# EAGLE board GrapherBlanK7 (EAGLE 5.10)
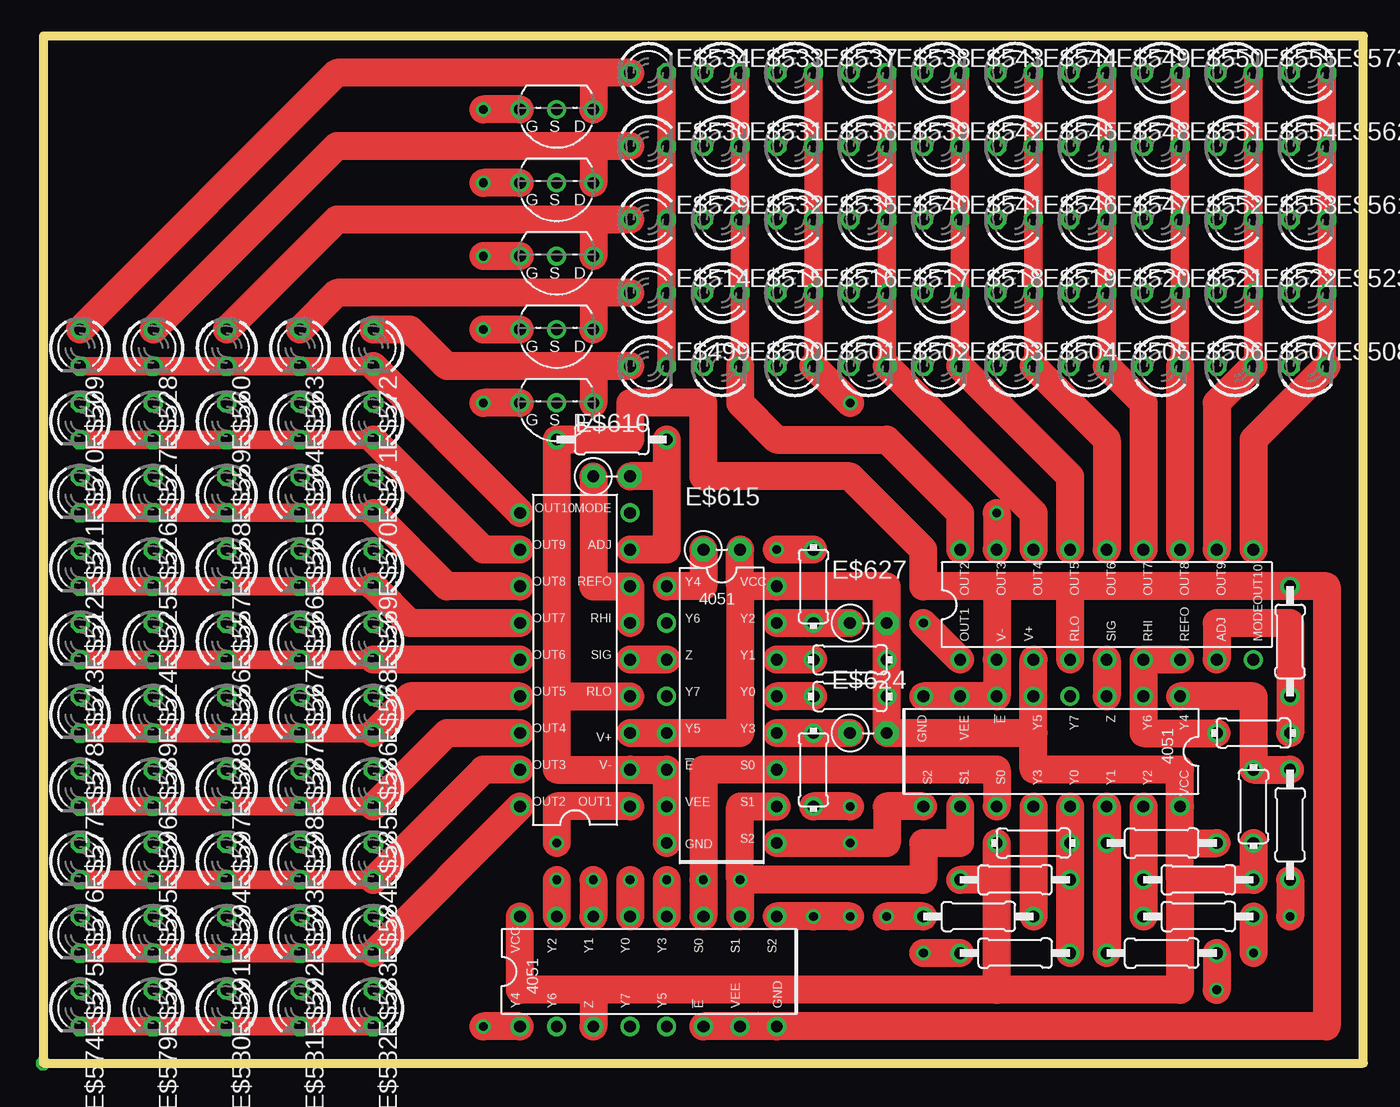
[diagram p0: board, top side]
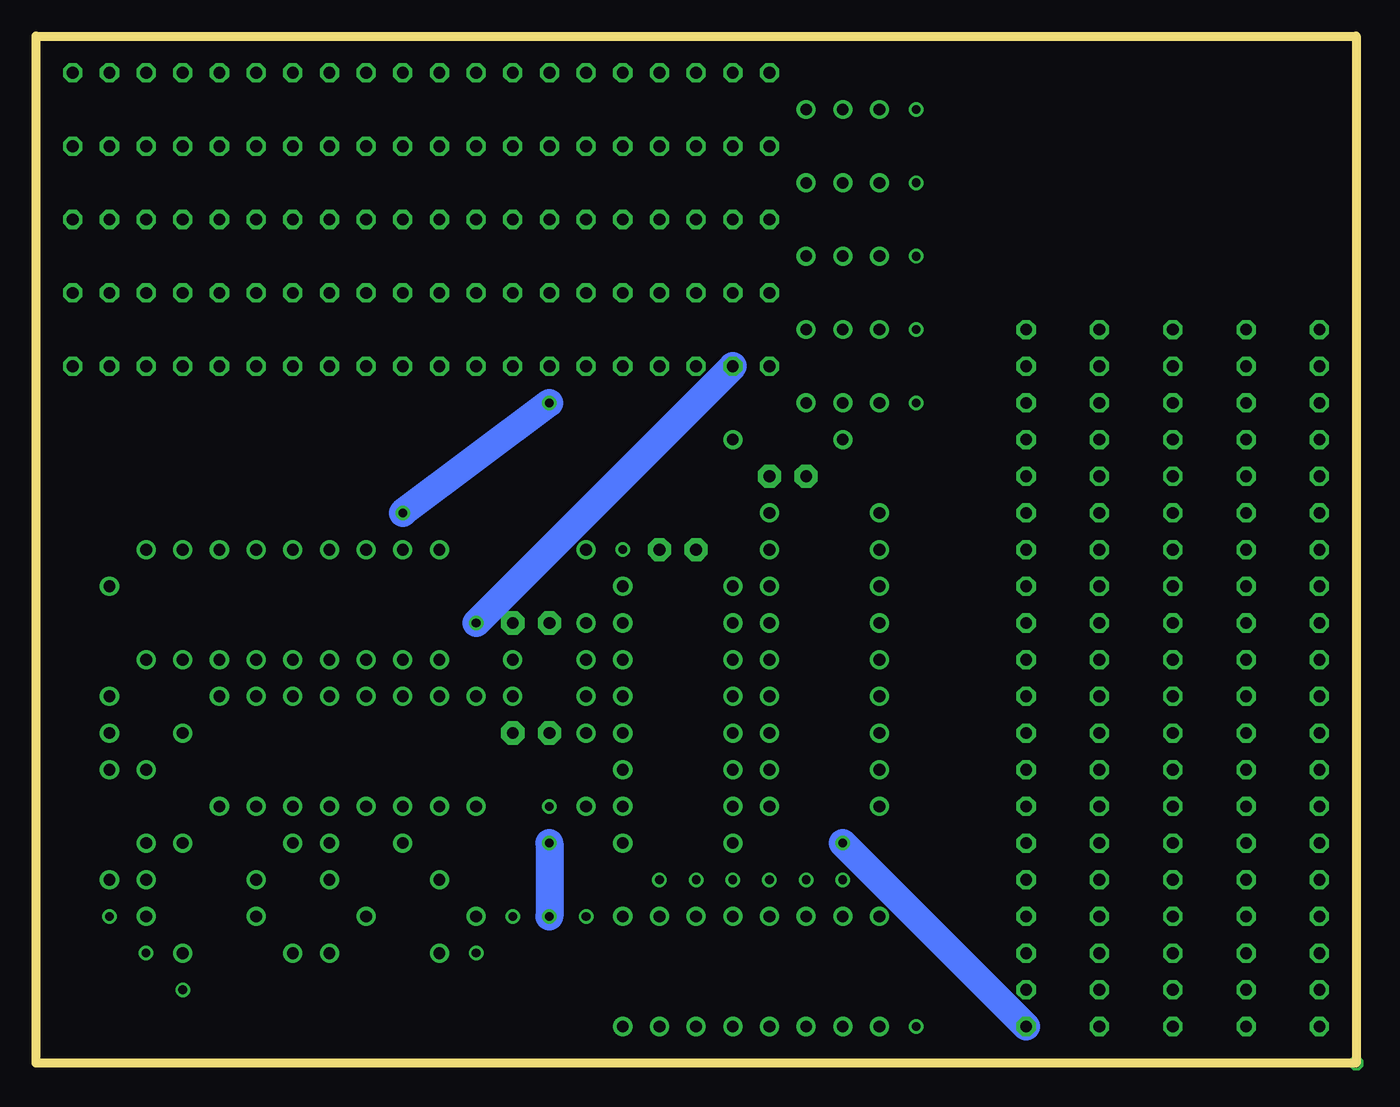
[diagram p1: board, bottom side, seen from below]

Size 91.44 x 71.12 mm. Coordinates in mm from the lower left corner, seen from the top.
Outline: 0,71.12 0,0 91.44,0 91.44,71.12 0,71.12
Copper layers (1*16): Top 0.035mm / dielectric 1.5mm / Bottom 0.035mm
Design rules "default": minimum track width 10mil, minimum drill 24mil, track to track 8mil, track to pad 8mil, pad to pad 8mil, via to via 8mil, smd to smd 8mil, copper to edge 40mil, drill to drill 8mil, minimum pad ring 10mil, minimum via ring 8mil, stop-mask expansion 4mil, vias tented up to drill 0mil, thermal gap 10mil
Milling: 1 lines

## Footprints (pad centres in the part's own frame; a part is rotated, then mirrored left to right if it is on the bottom)
RESISTOR-S2 = drill 0.813 round: IN1 -2.54,0; IN2 2.54,0
LED3MM = drill 0.813 octagon: A -1.27,0; K 1.27,0
LM3914-10LED-BARGRAPH = drill 0.813 round: 1!R -3.81,1.27; 1!S -3.81,3.81; 1Q 3.81,1.27; 2!R -3.81,-3.81; 2!S -3.81,-6.35; 2Q 3.81,-8.89; 2Q1 3.81,-11.43; 2Q3 -3.81,-11.43; 3!R 3.81,-1.27; 3!S 3.81,-3.81; 3Q 3.81,-6.35; 4!R 3.81,3.81; 4!S 3.81,6.35; 4Q -3.81,8.89; GND -3.81,-8.89; NC -3.81,6.35; OE -3.81,-1.27; VCC 3.81,8.89
4051-ANALOG-MUX = drill 0.813 round: CLOCK 3.81,-6.35; GND -3.81,-8.89; Q0 3.81,-8.89; Q1 -3.81,-6.35; Q2 -3.81,-3.81; Q3 -3.81,-1.27; Q4 -3.81,3.81; Q5 -3.81,6.35; Q6 -3.81,1.27; Q7 3.81,1.27; Q8 3.81,-1.27; Q9 3.81,3.81; Q10 3.81,6.35; Q11 -3.81,8.89; RESET 3.81,-3.81; VCC 3.81,8.89
RESISTOR = drill 0.813 round: IN1 -3.81,0; IN2 3.81,0
RS-2,5 = drill 0.813 pad 1.6 octagon: 1 -1.27,0; 2 1.27,0
TRANSISTOR = drill 0.8 round: P$1 0,0; P$2 2.54,0; P$3 -2.54,0

## Placement (x,y rotation side)
E$1  [RESISTOR-S2]  53.34,33.02 270 top
E$2  [RESISTOR-S2]  55.88,25.4 0 top
E$3  [RESISTOR-S2]  55.88,27.94 0 top
E$51  [LED3MM]  99.06,44.45 90 top  (outside the outline)
E$52  [LED3MM]  104.14,44.45 90 top  (outside the outline)
E$53  [LED3MM]  109.22,44.45 90 top  (outside the outline)
E$54  [LED3MM]  114.3,44.45 90 top  (outside the outline)
E$55  [LED3MM]  119.38,44.45 90 top  (outside the outline)
E$56  [LED3MM]  124.46,44.45 90 top  (outside the outline)
E$57  [LED3MM]  129.54,44.45 90 top  (outside the outline)
E$58  [LED3MM]  134.62,44.45 90 top  (outside the outline)
E$59  [LED3MM]  139.7,44.45 90 top  (outside the outline)
E$60  [LED3MM]  144.78,44.45 90 top  (outside the outline)
E$61  [LED3MM]  99.06,49.53 90 top  (outside the outline)
E$62  [LED3MM]  104.14,49.53 90 top  (outside the outline)
E$63  [LED3MM]  109.22,49.53 90 top  (outside the outline)
E$64  [LED3MM]  114.3,49.53 90 top  (outside the outline)
E$65  [LED3MM]  119.38,49.53 90 top  (outside the outline)
E$66  [LED3MM]  124.46,49.53 90 top  (outside the outline)
E$67  [LED3MM]  129.54,49.53 90 top  (outside the outline)
E$68  [LED3MM]  134.62,49.53 90 top  (outside the outline)
E$69  [LED3MM]  139.7,49.53 90 top  (outside the outline)
E$70  [LED3MM]  144.78,49.53 90 top  (outside the outline)
E$71  [LED3MM]  99.06,54.61 90 top  (outside the outline)
E$72  [LED3MM]  104.14,54.61 90 top  (outside the outline)
E$73  [LED3MM]  109.22,54.61 90 top  (outside the outline)
E$74  [LED3MM]  114.3,54.61 90 top  (outside the outline)
E$75  [LED3MM]  119.38,54.61 90 top  (outside the outline)
E$76  [LED3MM]  124.46,54.61 90 top  (outside the outline)
E$77  [LED3MM]  129.54,54.61 90 top  (outside the outline)
E$78  [LED3MM]  134.62,54.61 90 top  (outside the outline)
E$79  [LED3MM]  139.7,54.61 90 top  (outside the outline)
E$80  [LED3MM]  144.78,54.61 90 top  (outside the outline)
E$81  [LED3MM]  99.06,59.69 90 top  (outside the outline)
E$82  [LED3MM]  104.14,59.69 90 top  (outside the outline)
E$83  [LED3MM]  109.22,59.69 90 top  (outside the outline)
E$84  [LED3MM]  114.3,59.69 90 top  (outside the outline)
E$85  [LED3MM]  119.38,59.69 90 top  (outside the outline)
E$86  [LED3MM]  124.46,59.69 90 top  (outside the outline)
E$87  [LED3MM]  129.54,59.69 90 top  (outside the outline)
E$88  [LED3MM]  134.62,59.69 90 top  (outside the outline)
E$89  [LED3MM]  139.7,59.69 90 top  (outside the outline)
E$90  [LED3MM]  144.78,59.69 90 top  (outside the outline)
E$91  [LED3MM]  99.06,64.77 90 top  (outside the outline)
E$92  [LED3MM]  104.14,64.77 90 top  (outside the outline)
E$93  [LED3MM]  109.22,64.77 90 top  (outside the outline)
E$94  [LED3MM]  114.3,64.77 90 top  (outside the outline)
E$95  [LED3MM]  119.38,64.77 90 top  (outside the outline)
E$96  [LED3MM]  124.46,64.77 90 top  (outside the outline)
E$97  [LED3MM]  129.54,64.77 90 top  (outside the outline)
E$98  [LED3MM]  134.62,64.77 90 top  (outside the outline)
E$99  [LED3MM]  139.7,64.77 90 top  (outside the outline)
E$100  [LED3MM]  144.78,64.77 90 top  (outside the outline)
E$101  [LED3MM]  99.06,3.81 90 top  (outside the outline)
E$102  [LED3MM]  104.14,3.81 90 top  (outside the outline)
E$103  [LED3MM]  109.22,3.81 90 top  (outside the outline)
E$104  [LED3MM]  114.3,3.81 90 top  (outside the outline)
E$105  [LED3MM]  119.38,3.81 90 top  (outside the outline)
E$106  [LED3MM]  124.46,3.81 90 top  (outside the outline)
E$107  [LED3MM]  129.54,3.81 90 top  (outside the outline)
E$108  [LED3MM]  134.62,3.81 90 top  (outside the outline)
E$109  [LED3MM]  139.7,3.81 90 top  (outside the outline)
E$110  [LED3MM]  144.78,3.81 90 top  (outside the outline)
E$111  [LED3MM]  99.06,8.89 90 top  (outside the outline)
E$112  [LED3MM]  104.14,8.89 90 top  (outside the outline)
E$113  [LED3MM]  109.22,8.89 90 top  (outside the outline)
E$114  [LED3MM]  114.3,8.89 90 top  (outside the outline)
E$115  [LED3MM]  119.38,8.89 90 top  (outside the outline)
E$116  [LED3MM]  124.46,8.89 90 top  (outside the outline)
E$117  [LED3MM]  129.54,8.89 90 top  (outside the outline)
E$118  [LED3MM]  134.62,8.89 90 top  (outside the outline)
E$119  [LED3MM]  139.7,8.89 90 top  (outside the outline)
E$120  [LED3MM]  144.78,8.89 90 top  (outside the outline)
E$121  [LED3MM]  99.06,13.97 90 top  (outside the outline)
E$122  [LED3MM]  104.14,13.97 90 top  (outside the outline)
E$123  [LED3MM]  109.22,13.97 90 top  (outside the outline)
E$124  [LED3MM]  114.3,13.97 90 top  (outside the outline)
E$125  [LED3MM]  119.38,13.97 90 top  (outside the outline)
E$126  [LED3MM]  124.46,13.97 90 top  (outside the outline)
E$127  [LED3MM]  129.54,13.97 90 top  (outside the outline)
E$128  [LED3MM]  134.62,13.97 90 top  (outside the outline)
E$129  [LED3MM]  139.7,13.97 90 top  (outside the outline)
E$130  [LED3MM]  144.78,13.97 90 top  (outside the outline)
E$131  [LED3MM]  99.06,19.05 90 top  (outside the outline)
E$132  [LED3MM]  104.14,19.05 90 top  (outside the outline)
E$133  [LED3MM]  109.22,19.05 90 top  (outside the outline)
E$134  [LED3MM]  114.3,19.05 90 top  (outside the outline)
E$135  [LED3MM]  119.38,19.05 90 top  (outside the outline)
E$136  [LED3MM]  124.46,19.05 90 top  (outside the outline)
E$137  [LED3MM]  129.54,19.05 90 top  (outside the outline)
E$138  [LED3MM]  134.62,19.05 90 top  (outside the outline)
E$139  [LED3MM]  139.7,19.05 90 top  (outside the outline)
E$140  [LED3MM]  144.78,19.05 90 top  (outside the outline)
E$141  [LED3MM]  99.06,24.13 90 top  (outside the outline)
E$142  [LED3MM]  104.14,24.13 90 top  (outside the outline)
E$143  [LED3MM]  109.22,24.13 90 top  (outside the outline)
E$144  [LED3MM]  114.3,24.13 90 top  (outside the outline)
E$145  [LED3MM]  119.38,24.13 90 top  (outside the outline)
E$146  [LED3MM]  124.46,24.13 90 top  (outside the outline)
E$147  [LED3MM]  129.54,24.13 90 top  (outside the outline)
E$148  [LED3MM]  134.62,24.13 90 top  (outside the outline)
E$149  [LED3MM]  139.7,24.13 90 top  (outside the outline)
E$150  [LED3MM]  144.78,24.13 90 top  (outside the outline)
E$151  [LM3914-10LED-BARGRAPH]  133.35,36.83 90 top  (outside the outline)
E$152  [LM3914-10LED-BARGRAPH]  110.49,36.83 270 top  (outside the outline)
E$499  [LED3MM]  41.91,48.26 0 top
E$500  [LED3MM]  46.99,48.26 0 top
E$501  [LED3MM]  52.07,48.26 0 top
E$502  [LED3MM]  57.15,48.26 0 top
E$503  [LED3MM]  62.23,48.26 0 top
E$504  [LED3MM]  67.31,48.26 0 top
E$505  [LED3MM]  72.39,48.26 0 top
E$506  [LED3MM]  77.47,48.26 0 top
E$507  [LED3MM]  82.55,48.26 0 top
E$508  [LED3MM]  87.63,48.26 0 top
E$509  [LED3MM]  2.54,49.53 270 top
E$510  [LED3MM]  2.54,44.45 270 top
E$511  [LED3MM]  2.54,39.37 270 top
E$512  [LED3MM]  2.54,34.29 270 top
E$513  [LED3MM]  2.54,29.21 270 top
E$514  [LED3MM]  41.91,53.34 0 top
E$515  [LED3MM]  46.99,53.34 0 top
E$516  [LED3MM]  52.07,53.34 0 top
E$517  [LED3MM]  57.15,53.34 0 top
E$518  [LED3MM]  62.23,53.34 0 top
E$519  [LED3MM]  67.31,53.34 0 top
E$520  [LED3MM]  72.39,53.34 0 top
E$521  [LED3MM]  77.47,53.34 0 top
E$522  [LED3MM]  82.55,53.34 0 top
E$523  [LED3MM]  87.63,53.34 0 top
E$524  [LED3MM]  7.62,29.21 270 top
E$525  [LED3MM]  7.62,34.29 270 top
E$526  [LED3MM]  7.62,39.37 270 top
E$527  [LED3MM]  7.62,44.45 270 top
E$528  [LED3MM]  7.62,49.53 270 top
E$529  [LED3MM]  41.91,58.42 0 top
E$530  [LED3MM]  41.91,63.5 0 top
E$531  [LED3MM]  46.99,63.5 0 top
E$532  [LED3MM]  46.99,58.42 0 top
E$533  [LED3MM]  46.99,68.58 0 top
E$534  [LED3MM]  41.91,68.58 0 top
E$535  [LED3MM]  52.07,58.42 0 top
E$536  [LED3MM]  52.07,63.5 0 top
E$537  [LED3MM]  52.07,68.58 0 top
E$538  [LED3MM]  57.15,68.58 0 top
E$539  [LED3MM]  57.15,63.5 0 top
E$540  [LED3MM]  57.15,58.42 0 top
E$541  [LED3MM]  62.23,58.42 0 top
E$542  [LED3MM]  62.23,63.5 0 top
E$543  [LED3MM]  62.23,68.58 0 top
E$544  [LED3MM]  67.31,68.58 0 top
E$545  [LED3MM]  67.31,63.5 0 top
E$546  [LED3MM]  67.31,58.42 0 top
E$547  [LED3MM]  72.39,58.42 0 top
E$548  [LED3MM]  72.39,63.5 0 top
E$549  [LED3MM]  72.39,68.58 0 top
E$550  [LED3MM]  77.47,68.58 0 top
E$551  [LED3MM]  77.47,63.5 0 top
E$552  [LED3MM]  77.47,58.42 0 top
E$553  [LED3MM]  82.55,58.42 0 top
E$554  [LED3MM]  82.55,63.5 0 top
E$555  [LED3MM]  82.55,68.58 0 top
E$556  [LED3MM]  12.7,29.21 270 top
E$557  [LED3MM]  12.7,34.29 270 top
E$558  [LED3MM]  12.7,39.37 270 top
E$559  [LED3MM]  12.7,44.45 270 top
E$560  [LED3MM]  12.7,49.53 270 top
E$561  [LED3MM]  87.63,58.42 0 top
E$562  [LED3MM]  87.63,63.5 0 top
E$563  [LED3MM]  17.78,49.53 270 top
E$564  [LED3MM]  17.78,44.45 270 top
E$565  [LED3MM]  17.78,39.37 270 top
E$566  [LED3MM]  17.78,34.29 270 top
E$567  [LED3MM]  17.78,29.21 270 top
E$568  [LED3MM]  22.86,29.21 270 top
E$569  [LED3MM]  22.86,34.29 270 top
E$570  [LED3MM]  22.86,39.37 270 top
E$571  [LED3MM]  22.86,44.45 270 top
E$572  [LED3MM]  22.86,49.53 270 top
E$573  [LED3MM]  87.63,68.58 0 top
E$574  [LED3MM]  2.54,3.81 270 top
E$575  [LED3MM]  2.54,8.89 270 top
E$576  [LED3MM]  2.54,13.97 270 top
E$577  [LED3MM]  2.54,19.05 270 top
E$578  [LED3MM]  2.54,24.13 270 top
E$579  [LED3MM]  7.62,3.81 270 top
E$580  [LED3MM]  12.7,3.81 270 top
E$581  [LED3MM]  17.78,3.81 270 top
E$582  [LED3MM]  22.86,3.81 270 top
E$583  [LED3MM]  22.86,8.89 270 top
E$584  [LED3MM]  22.86,13.97 270 top
E$585  [LED3MM]  22.86,19.05 270 top
E$586  [LED3MM]  22.86,24.13 270 top
E$587  [LED3MM]  17.78,24.13 270 top
E$588  [LED3MM]  12.7,24.13 270 top
E$589  [LED3MM]  7.62,24.13 270 top
E$590  [LED3MM]  7.62,8.89 270 top
E$591  [LED3MM]  12.7,8.89 270 top
E$592  [LED3MM]  17.78,8.89 270 top
E$593  [LED3MM]  17.78,13.97 270 top
E$594  [LED3MM]  12.7,13.97 270 top
E$595  [LED3MM]  7.62,13.97 270 top
E$596  [LED3MM]  7.62,19.05 270 top
E$597  [LED3MM]  12.7,19.05 270 top
E$598  [LED3MM]  17.78,19.05 270 top
E$599  [LM3914-10LED-BARGRAPH]  72.39,31.75 90 top
E$600  [4051-ANALOG-MUX]  69.85,21.59 270 top
E$601  [RESISTOR-S2]  83.82,22.86 180 top
E$602  [RESISTOR]  86.36,29.21 270 top
E$603  [RESISTOR]  77.47,7.62 0 top
E$604  [RESISTOR]  80.01,12.7 0 top
E$605  [RESISTOR]  77.47,15.24 0 top
E$606  [RESISTOR]  80.01,10.16 0 top
E$607  [RESISTOR]  67.31,12.7 0 top
E$609  [RESISTOR-S2]  68.58,15.24 180 top
E$610  [RS-2,5]  39.37,40.64 0 top
E$611  [RESISTOR]  86.36,16.51 270 top
E$613  [LM3914-10LED-BARGRAPH]  36.83,26.67 180 top
E$614  [4051-ANALOG-MUX]  46.99,24.13 0 top
E$615  [RS-2,5]  46.99,35.56 0 top
E$616  [RESISTOR]  39.37,43.18 180 top
E$617  [TRANSISTOR]  35.56,50.8 180 top
E$618  [TRANSISTOR]  35.56,45.72 180 top
E$619  [TRANSISTOR]  35.56,55.88 180 top
E$620  [TRANSISTOR]  35.56,60.96 180 top
E$621  [TRANSISTOR]  35.56,66.04 180 top
E$623  [4051-ANALOG-MUX]  41.91,6.35 90 top
E$624  [RS-2,5]  57.15,22.86 0 top
E$627  [RS-2,5]  57.15,30.48 0 top
E$628  [RESISTOR-S2]  53.34,20.32 270 top
E$629  [RESISTOR]  64.77,10.16 0 top
E$630  [RESISTOR]  67.31,7.62 0 top
E$631  [RESISTOR-S2]  83.82,17.78 270 top

## Library data of the parts
E$1-E$3 E$151 E$152 E$599-E$607 E$609 E$611 E$613 E$614 E$616-E$621 E$623 E$628-E$631 = RussellLibrary
E$51-E$150 E$499-E$598 = led
E$610 E$615 E$624 E$627 = discrete

## Nets
GND: E$599.1!R E$599.NC E$600.GND E$600.Q2 E$613.1!R E$613.NC E$614.GND E$614.Q2 E$616.IN2 E$623.GND E$623.Q2
S$3: E$613.4Q
S$4: E$501.K E$537.K E$599.4!S
S$193: E$613.OE E$614.Q4
S$194: E$613.2!R E$613.2!S
S$195: E$509.K E$572.K E$613.2Q1
S$196: E$613.GND E$616.IN1
S$198: E$504.K E$544.K E$599.3!R
S$199: E$505.K E$549.K E$599.3!S
S$200: E$506.K E$550.K E$599.3Q
S$201: E$507.K E$555.K E$599.2Q
S$202: E$508.K E$573.K E$599.2Q1
S$203: E$600.CLOCK E$614.CLOCK E$623.CLOCK
S$204: E$499.A E$572.A E$618.P$3
S$205: E$514.A E$563.A E$617.P$3
S$206: E$529.A E$560.A E$619.P$3
S$207: E$513.K E$568.K
S$208: E$600.Q10
S$209: E$528.A E$530.A E$620.P$3
S$210: E$509.A E$534.A E$621.P$3
S$211: E$575.K E$583.K E$613.VCC
S$213: E$503.K E$543.K E$599.1Q
S$214: E$499.K E$534.K E$599.4Q
S$216: E$614.Q8 E$624.1
S$218: E$623.Q11
S$219: E$621.P$2
S$220: E$620.P$2
S$221: E$619.P$2
S$222: E$617.P$2
S$223: E$599.OE E$600.Q4
S$224: E$599.GND
S$225: E$599.2!R E$599.2!S
S$226: E$502.K E$538.K E$599.4!R
S$227: E$600.Q9 E$603.IN1
S$228: E$623.Q10
S$229: E$623.Q9
S$230: E$623.Q8
S$231: E$623.Q7
S$232: E$600.Q7 E$630.IN2
S$233: E$600.Q8
S$234: E$600.Q0 E$614.Q0 E$623.Q0
S$235: E$500.K E$533.K E$599.VCC
S$236: E$600.RESET E$614.RESET E$623.RESET
S$237: E$618.P$2
S$238: E$614.Q7
S$239: E$614.Q9
S$240: E$614.Q10 E$627.1
S$241: E$510.K E$571.K E$613.2Q
S$242: E$511.K E$570.K E$613.3Q
S$243: E$512.K E$569.K E$613.3!S
S$244: E$613.3!R
S$245: E$600.Q11 E$611.IN1
S$246: E$578.K E$586.K E$613.1Q
S$247: E$577.K E$585.K E$613.4!R
S$248: E$576.K E$584.K E$613.4!S
S$250: E$614.Q11 E$615.1
S$251: E$599.1!S E$600.VCC E$604.IN2 E$605.IN2 E$607.IN1 E$609.IN2 E$613.1!S E$614.VCC E$615.2 E$623.Q4 E$623.VCC E$627.2 E$631.IN2
S$252: E$574.K E$582.K
S$253: E$629.IN1
S$254: E$630.IN1
S$255: E$611.IN2
S$256: E$603.IN2
S$257: E$606.IN2
S$259: E$628.IN2

## Tracks (layer width: path | path; a pad name or v marks a point on that pad's centre or on a via)
GND
  Top 1.93: E$600.GND E$600.Q2 E$599.NC 66.04,33.02 | E$623.Q2 E$623.GND 88.9,2.54 88.9,33.02 71.12,33.02 | 71.12,33.02 66.04,33.02 | 71.12,33.02 E$599.1!R | E$614.GND E$614.Q2 E$613.NC 35.56,20.32 35.56,25.4 | 35.56,25.4 E$613.1!R | 35.56,25.4 E$616.IN2 40.64,43.18 40.64,45.72 45.72,45.72 45.72,40.64 55.88,40.64 60.96,35.56 60.96,33.02 66.04,33.02
S$3  (via drill 0.6)
  Top 1.93: E$613.4Q 35.56,17.78 v35.56,15.24
  Bottom 1.93: v35.56,15.24 22.86,2.54
S$4  (via drill 0.6)
  Top 1.27: E$537.K E$501.K
  Top 1.93: v66.04,38.1 E$599.4!S | E$501.K v55.88,45.72
  Bottom 1.93: v66.04,38.1 v55.88,45.72
  other vias: 66.04,35.56 53.34,48.26
S$25  (via drill 0.6)
  other vias: 0,0
S$193
  Top 1.93: E$614.Q4 E$613.OE
S$194
  Top 1.93: E$613.2!R E$613.2!S 38.1,33.02 38.1,40.64
S$195
  Top 1.27: E$572.K E$509.K
  Top 1.93: E$572.K E$613.2Q1
S$196
  Top 1.93: 43.18,40.64 43.18,35.56 E$613.GND | 43.18,40.64 40.64,40.64 | E$616.IN1 43.18,40.64
S$198
  Top 1.27: E$544.K E$504.K
  Top 1.93: E$504.K 73.66,43.18 E$599.3!R
S$199
  Top 1.27: E$549.K E$505.K
  Top 1.93: E$505.K 76.2,45.72 E$599.3!S
S$200
  Top 1.27: E$550.K E$506.K
  Top 1.93: E$506.K E$599.3Q
S$201
  Top 1.27: E$555.K E$507.K
  Top 1.93: E$507.K 81.28,45.72 E$599.2Q
S$202
  Top 1.27: E$573.K E$508.K
  Top 1.93: E$508.K 83.82,43.18 E$599.2Q1
S$203  (via drill 0.6)
  Top 1.93: E$614.CLOCK 48.26,17.78 v48.26,12.7 | v48.26,12.7 E$623.CLOCK | v48.26,12.7 60.96,12.7 60.96,15.24 63.5,15.24 E$600.CLOCK
S$204
  Top 1.93: E$499.A 38.1,48.26 | 38.1,48.26 E$618.P$3 | 38.1,48.26 27.94,48.26 25.4,50.8 E$572.A
S$205
  Top 1.93: 38.1,53.34 E$617.P$3 | 38.1,53.34 20.32,53.34 E$563.A | E$514.A 38.1,53.34
S$206
  Top 1.93: 38.1,58.42 E$619.P$3 | 38.1,58.42 20.32,58.42 E$560.A | E$529.A 38.1,58.42
S$207
  Top 1.27: E$568.K E$513.K
S$208
  Top 1.93: E$600.Q10 76.2,10.16
S$209
  Top 1.93: 38.1,63.5 E$620.P$3 | E$530.A 38.1,63.5 | 38.1,63.5 20.32,63.5 E$528.A
S$210
  Top 1.93: 38.1,68.58 E$621.P$3 | E$534.A 38.1,68.58 | 38.1,68.58 20.32,68.58 E$509.A
S$211
  Top 1.27: E$583.K E$575.K
  Top 1.93: E$613.VCC E$583.K
S$213
  Top 1.27: E$543.K E$503.K
  Top 1.93: E$503.K 71.12,40.64 E$599.1Q
S$214  (via drill 0.6)
  Top 1.27: E$534.K E$499.K
  Top 1.93: E$599.4Q v60.96,30.48
  Bottom 1.93: E$499.K v60.96,30.48
S$215  (via drill 0.6)
  Top 1.93: 53.34,35.56 v50.8,35.56
S$216
  Top 1.93: E$624.1 E$614.Q8
S$218  (via drill 0.6)
  Top 1.93: E$623.Q11 v30.48,2.54
  other vias: 33.02,2.54
S$219  (via drill 0.6)
  Top 1.93: E$621.P$2 v30.48,66.04
S$220  (via drill 0.6)
  Top 1.93: E$620.P$2 v30.48,60.96
S$221  (via drill 0.6)
  Top 1.93: E$619.P$2 v30.48,55.88
S$222  (via drill 0.6)
  Top 1.93: E$617.P$2 v30.48,50.8
S$223
  Top 1.93: E$599.OE E$600.Q4
S$224
  Top 1.93: E$599.GND 81.28,30.48 86.36,30.48 86.36,22.86
S$225
  Top 1.93: 81.28,22.86 76.2,22.86 E$599.2!R E$599.2!S
S$226
  Top 1.27: E$538.K E$502.K
  Top 1.93: E$502.K 68.58,38.1 E$599.4!R
S$227
  Top 1.93: E$600.Q9 E$603.IN1
S$228  (via drill 0.6)
  Top 1.93: v35.56,12.7 E$623.Q10
S$229  (via drill 0.6)
  Top 1.93: v38.1,12.7 E$623.Q9
S$230  (via drill 0.6)
  Top 1.93: v43.18,12.7 E$623.Q8
S$231  (via drill 0.6)
  Top 1.93: v40.64,12.7 E$623.Q7
S$232
  Top 1.93: E$600.Q7 E$630.IN2
S$233
  Top 1.93: E$600.Q8 68.58,10.16
S$234  (via drill 0.6)
  Top 1.93: v55.88,10.16 v53.34,10.16 E$623.Q0 | E$614.Q0 v55.88,15.24 58.42,15.24 58.42,17.78 E$600.Q0
  Bottom 1.93: v55.88,15.24 v55.88,10.16
S$235
  Top 1.27: E$533.K E$500.K
  Top 1.93: E$599.VCC 63.5,38.1 58.42,43.18 50.8,43.18 48.26,45.72 E$500.K
S$236  (via drill 0.6)
  Top 1.93: E$600.RESET 66.04,20.32 E$614.RESET 45.72,20.32 v45.72,12.7 E$623.RESET
S$237  (via drill 0.6)
  Top 1.93: E$618.P$2 v30.48,45.72
S$238
  Top 1.93: 53.34,25.4 E$614.Q7
S$239
  Top 1.93: 53.34,27.94 E$614.Q9
S$240
  Top 1.93: E$627.1 E$614.Q10
S$241
  Top 1.27: E$571.K E$510.K
  Top 1.93: E$613.2Q 30.48,35.56 E$571.K
S$242
  Top 1.27: E$570.K E$511.K
  Top 1.93: E$613.3Q 27.94,33.02 E$570.K
S$243
  Top 1.27: E$569.K E$512.K
  Top 1.93: E$613.3!S 25.4,30.48 E$569.K
S$244
  Top 1.93: E$613.3!R 22.86,27.94
S$245
  Top 1.93: E$600.Q11 83.82,25.4 83.82,20.32 E$611.IN1
S$246
  Top 1.27: E$586.K E$578.K
  Top 1.93: E$613.1Q 25.4,25.4 E$586.K
S$247
  Top 1.27: E$585.K E$577.K
  Top 1.93: E$613.4!R 27.94,22.86 E$585.K
S$248
  Top 1.27: E$584.K E$576.K
  Top 1.93: E$613.4!S 30.48,20.32 E$584.K
S$250
  Top 1.93: E$614.Q11 45.72,33.02 E$615.1
S$251
  Top 1.93: E$613.1!S 48.26,22.86 48.26,33.02 | 48.26,33.02 E$614.VCC 58.42,33.02 E$627.2 58.42,22.86 68.58,22.86 | 48.26,33.02 E$615.2 | E$623.VCC 33.02,5.08 38.1,5.08 | 66.04,12.7 E$609.IN2 | 38.1,5.08 E$623.Q4 | 66.04,5.08 38.1,5.08 | 66.04,5.08 66.04,12.7 | 66.04,5.08 78.74,5.08 78.74,12.7 | 68.58,22.86 68.58,20.32 78.74,20.32 E$600.VCC 78.74,15.24 | 68.58,22.86 E$599.1!S | 78.74,12.7 78.74,15.24 | 78.74,12.7 E$604.IN2 E$631.IN2 | 78.74,15.24 E$605.IN2 | 66.04,12.7 E$607.IN1
S$252
  Top 1.27: E$582.K E$574.K
S$253  (via drill 0.6)
  Top 1.93: E$629.IN1 v58.42,10.16
S$254  (via drill 0.6)
  Top 1.93: E$630.IN1 v60.96,7.62
S$255  (via drill 0.6)
  Top 1.93: E$611.IN2 v86.36,10.16
S$256  (via drill 0.6)
  Top 1.93: E$603.IN2 v81.28,5.08
S$257  (via drill 0.6)
  Top 1.93: E$606.IN2 v83.82,7.62
S$259  (via drill 0.6)
  Top 1.93: v55.88,17.78 E$628.IN2

## Text on the board
tPlace: G | S | D | G | S | D | G | S | D | G | S | D | G | S | D